# Altium PCB esp32wrom.PcbDoc
Units mm, origin at the board's own origin, x right, y up, seen from the top; angles counter-clockwise.
Board outline 50.04 x 27.94 mm, 2 copper layers (Top Layer, Bottom Layer); 27 components, 25 nets, 182 pads, 32 vias.
Unrouted connection lines stored in the file: 2.
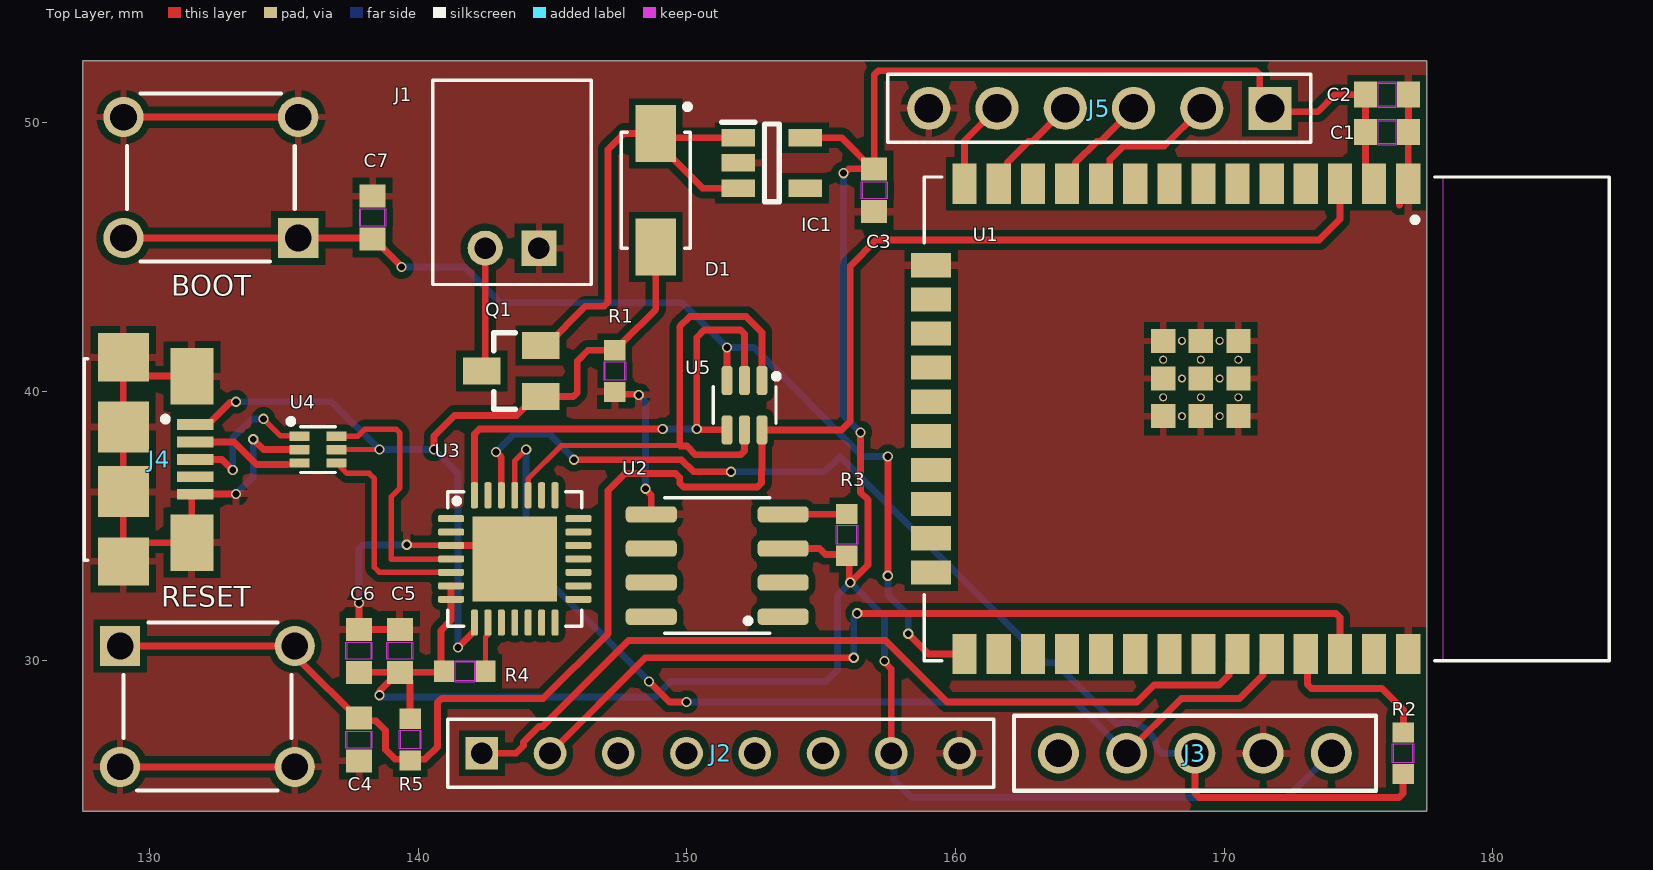
[diagram p0: Top Layer view]
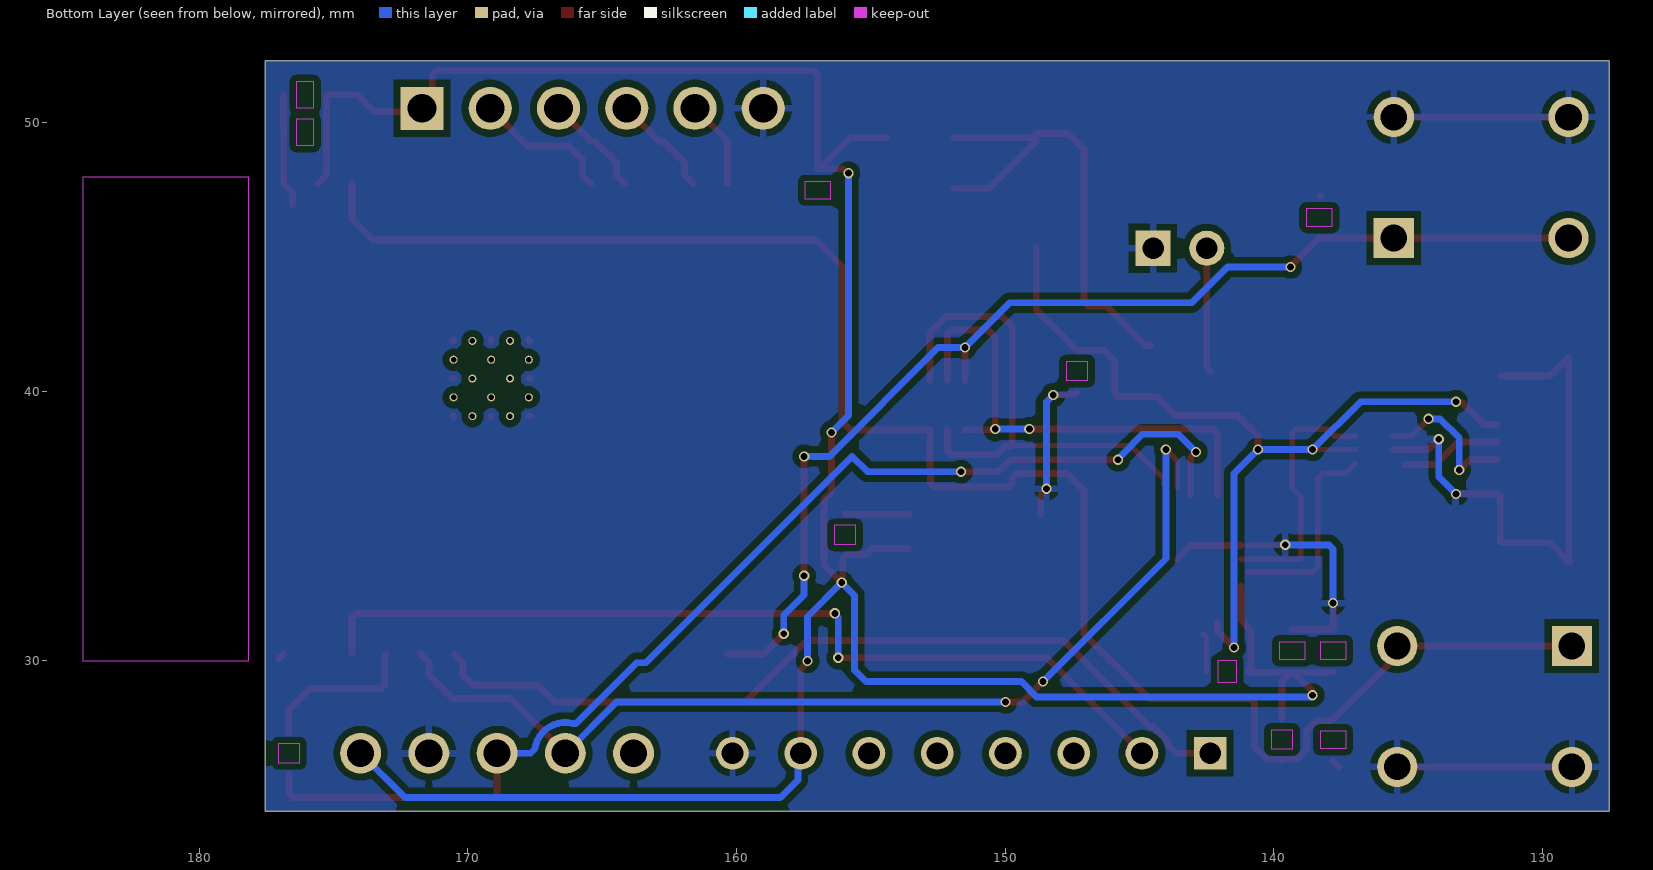
[diagram p1: Bottom Layer view, seen from below]
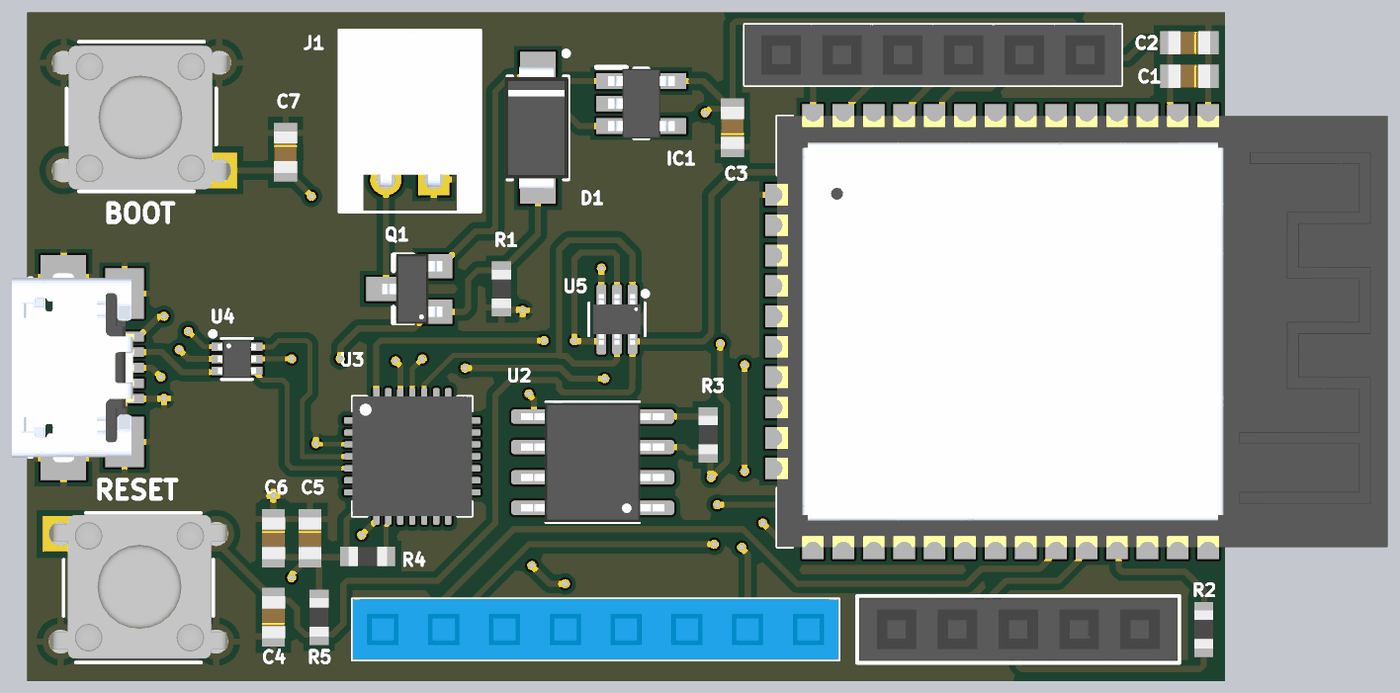
[diagram p2: 3D render of the assembled board from above, using the file's embedded part models]

## Layer stack, top to bottom
Top Solder: solder mask 0.0102, Solder Resist, Dk 3.5
Top Layer: signal copper 0.0356
Dielectric 1: dielectric 0.32, FR-4, Dk 4.8
Bottom Layer: signal copper 0.0356
Bottom Solder: solder mask 0.0102, Solder Resist, Dk 3.5

## Board outline
127.508,24.384 127.508,52.324 177.546,52.324 177.546,24.384

## Design rules (kind name [scope] priority, off if disabled: settings)
Clearance [All] p1: gap=0.254 ignorepadtopadclearanceinfootprint=FALSE
PolygonConnect [All] p1: connectstyle=Relief reliefconductorwidth=0.254 reliefentries=4 polygonreliefangle="90 Angle" airgapwidth=0.254
RoutingVias [All] p1: holewidth=0.711 width=1.27 viastyle="Through Hole" minholewidth=0.711 minwidth=1.27 maxholewidth=0.711 maxwidth=1.27
SolderMaskExpansion [All] p1: expansion=0.102 istentingtop=FALSE
SupplyNets "Schematic Supply Nets_1" [InNet('3V3')] p1: voltage=0.000
SupplyNets "Schematic Supply Nets" [InNet('GND')] p2: voltage=0.000
Width [All] p1: maxlimit=0.254 minlimit=0.254 preferedwidth=0.254
30 further rules are at their usual default settings.

## Components (designator, comment, footprint, x,y, rotation, side; value= is the part's Value field where it differs from the comment)
BOOT "1825910-3" SW4_1825910-A_TEC 129.032,50.22 r180 top (schematic designator SW2)
C1 "0.1uF" 0603_AVX 176.057,49.657 r180 top
C2 "22uF" 0603_AVX 176.057,51.054 r180 top
C3 "22uF" 0603_AVX 156.972,47.498 r90 top
C4 "0.1uF" 0603_AVX 137.795,27.051 r90 top
C5 "0.1uF" 0603_AVX 139.319,30.353 r270 top
C6 "1uF" 0603_AVX 137.795,30.353 r270 top
C7 "0.1uF" 0603_AVX 138.303,46.482 r270 top
D1 "SS14" DIOM4325X250N 148.844,47.498 r270 top
IC1 "RT9080-33GJ5" SOT94P280X100-5N 153.162,48.514 r0 top
J1 "2pin" JST_S2B-PH-K-S(LF)(SN) 143.494,45.339 r180 top
J2 "8pin" AMPHENOL_76308-108LF 151.257,26.543 r180 top
J3 "PPPC051LFBN-RC" CONN_PPPC051LFBN-RC_SUL 173.99,26.543 r180 top
J4 "micro-usb" AMPHENOL_10118192-0002LF 131.699,37.48 r270 top
J5 "6pin" SULLINS_PPTC061LFBN-RC 165.354,50.546 r180 top
Q1 "FDN306P" SSOT-3 143.467,40.767 r90 top
R1 "4.7kR" RC0603N_PAN 147.32,40.767 r270 top
R2 "500R" RC0603N_PAN 176.657,26.543 r90 top
R3 "4.7kR" RC0603N_PAN 155.956,34.671 r270 top
R4 "4.7kR" RC0603N_PAN 141.732,29.591 r180 top
R5 "4.7kR" RC0603N_PAN 139.7,27.051 r270 top
RESET "1825910-3" SW4_1825910-A_TEC 135.405,26.035 r0 top (schematic designator SW1)
U1 "ESP32-WROOM-32E_(16MB)" XCVR_ESP32-WROOM-32E_(16MB) 171.587,38.989 r270 top
U2 "DS18B20Z" SOIC127P600X175-8N 151.13,33.528 r180 top
U3 "CP2102-GM" QFN50P500X500X100-29N 143.594,33.774 r0 top
U4 "USBLC6-2P6" SOT50P160X60-6N 136.271,37.846 r0 top
U5 "UMH3NTN" SOP65P210X100-6N 152.146,39.497 r270 top

## Footprints (in the part's own frame and the unit in brackets; to place one, negate y for a bottom-side part, rotate by r counter-clockwise, add the part's x,y. Pads: shape width x height; smd on the part's side, far side on the other; paste and mask are expansions set on the pad)
0603_AVX [mil]
  rect 33.78x38 smd paste+0 mask+0: 1(-31.39,0) 2(31.39,0)
  Top Layer keep-out region: -12.5,-17 -12.5,17 12.5,17 12.5,-17
  Keep-Out Layer region: -12.5,-19 -12.5,19 12.5,19 12.5,-19
  body extent -34,-19 34,19, height 35
AMPHENOL_76308-108LF [mm]
  rect 1.22x1.22 / inner round 1.22 / far side rect 1.22x1.22 hole 0.81: 01(8.89,0)
  round 1.22 hole 0.81: 02(6.35,0) 03(3.81,0) 04(1.27,0) 05(-1.27,0) 06(-3.81,0) 07(-6.35,0) 08(-8.89,0)
  silkscreen extent -10.16,-1.27 10.16,1.27, body extent -10.16,-1.27 10.16,1.27, height 8.51
AMPHENOL_10118192-0002LF [mm]
  rect 0.4x1.35 smd: 1(-1.3,0) 2(-0.65,0) 3(0,0) 4(0.65,0) 5(1.3,0)
  rect 2.1x1.6 smd: S1(-3.1,-0.125) S2(3.1,-0.125)
  rect 1.8x1.9 smd: S3(-3.8,-2.675) S6(3.8,-2.675)
  rect 1.9x1.9 smd: S4(-1.2,-2.675) S5(1.2,-2.675)
  silkscreen extent -3.75,-4.13 3.75,-1.01, body extent -3.95,-4.82 3.95,0.28, height 2.7
CONN_PPPC051LFBN-RC_SUL [mil]
  round 60 hole 40 paste-99999 mask-30: 1(0,0) 2(100,0) 3(200,0) 4(300,0) 5(400,0)
  silkscreen extent -65,-55 465,55, body extent -60,-50 460,50, height 335
DIOM4325X250N [mm]
  rect 2.12x1.5 smd paste+0 mask+0.102: A(2.115,0) C(-2.115,0)
  silkscreen extent -3.21,-1.28 2.16,1.28, body extent -2.55,-1.4 2.55,1.27, height 2.29
JST_S2B-PH-K-S(LF)(SN) [mm]
  rect 1.308x1.308 / inner round 1.308 / far side rect 1.308x1.308 hole 0.8: 1(-1,0)
  round 1.308 hole 0.8: 2(1,0)
  silkscreen extent -2.95,-6.25 2.95,1.35, body extent -2.95,-6.2 2.95,1.4, height 4.8
QFN50P500X500X100-29N [mm]
  rrect50% 0.97x0.26 smd: 1(-2.37,1.5) 2(-2.37,1) 3(-2.37,0.5) 4(-2.37,0) 5(-2.37,-0.5) 6(-2.37,-1) 7(-2.37,-1.5) 15(2.37,-1.5) 16(2.37,-1) 17(2.37,-0.5) 18(2.37,0) 19(2.37,0.5) 20(2.37,1) 21(2.37,1.5)
  rrect50% 0.26x0.97 smd: 8(-1.5,-2.37) 9(-1,-2.37) 10(-0.5,-2.37) 11(0,-2.37) 12(0.5,-2.37) 13(1,-2.37) 14(1.5,-2.37) 22(1.5,2.37) 23(1,2.37) 24(0.5,2.37) 25(0,2.37) 26(-0.5,2.37) 27(-1,2.37) 28(-1.5,2.37)
  rect 3.15x3.15 smd paste-0.585: 29(0,0)
  silkscreen extent -2.5,-2.5 2.5,2.5, body extent -2.5,-2.5 2.5,2.5, height 1
RC0603N_PAN [mm]
  rect 0.75x0.8 smd paste+0 mask+0: 1(-0.775,0) 2(0.775,0)
  Top Layer keep-out region: -0.349,-0.349 -0.349,0.349 0.349,0.349 0.349,-0.349
  Keep-Out Layer region: -0.349,-0.4 -0.349,0.4 0.349,0.4 0.349,-0.4
  body extent -0.8,-0.4 0.8,0.4, height 0.71
SOIC127P600X175-8N [mm]
  rrect50% 1.9x0.6 smd paste+0 mask+0.102: 1(-2.455,1.905) 2(-2.455,0.635) 3(-2.455,-0.635) 4(-2.455,-1.905) 5(2.455,-1.905) 6(2.455,-0.635) 7(2.455,0.635) 8(2.455,1.905)
  silkscreen extent -1.95,-2.52 1.95,2.52, body extent -3,-2.49 3,2.49, height 1.68
SOP65P210X100-6N [mm]
  rrect50% 1.09x0.4 smd: 1(-0.92,0.65) 2(-0.92,0) 3(-0.92,-0.65) 4(0.92,-0.65) 5(0.92,0) 6(0.92,0.65)
  silkscreen extent -1.18,-1.17 0.68,1.28, body extent -1.05,-1 1.05,1, height 1
SOT50P160X60-6N [mm]
  rrect8% 0.75x0.35 smd: 1(-0.69,0.5) 2(-0.69,0) 3(-0.69,-0.5) 4(0.69,-0.5) 5(0.69,0) 6(0.69,0.5)
  silkscreen extent -1.11,-0.85 0.65,1.15, body extent -0.8,-0.8 0.8,0.8, height 0.6
SOT94P280X100-5N [mm]
  rect 1.25x0.65 smd: 1(-1.25,0.94) 2(-1.25,0) 3(-1.25,-0.94) 4(1.25,-0.94) 5(1.25,0.94)
  silkscreen extent -1.88,-1.45 0.28,1.51, body extent -1.4,-1.45 1.4,1.45, height 1
SSOT-3 [mm]
  rect 1x1.4 smd: 1(-0.95,-1.1) 2(0.95,-1.1) 3(0,1.1)
  silkscreen extent -1.42,-0.15 1.42,0.66, body extent -1.46,-1.38 1.46,1.13, height 1.12
SULLINS_PPTC061LFBN-RC [mm]
  rect 1.605x1.605 / inner round 1.605 / far side rect 1.605x1.605 hole 1.07: 1(-6.35,0)
  round 1.605 hole 1.07: 2(-3.81,0) 3(-1.27,0) 4(1.27,0) 5(3.81,0) 6(6.35,0)
  silkscreen extent -7.87,-1.27 7.87,1.27, body extent -7.87,-1.27 7.87,1.27, height 8.51
SW4_1825910-A_TEC [mil]
  rect 59x59 / inner round 60 / far side rect 59x59 hole 39 paste-99999 mask+0: 1(-255.91,177.17)
  round 59 / inner round 60 / far side round 59 hole 39 paste-99999 mask-29.5: 2(0,177.17) 3(-255.91,0) 4(0,0)
  silkscreen extent -251,-34 -5,212, body extent -280,-28 27,208, height 150
XCVR_ESP32-WROOM-32E_(16MB) [mm]
  rect 1.5x0.9 smd: 1(-8.75,5.26) 2(-8.75,3.99) 3(-8.75,2.72) 4(-8.75,1.45) 5(-8.75,0.18) 6(-8.75,-1.09) 7(-8.75,-2.36) 8(-8.75,-3.63) 9(-8.75,-4.9) 10(-8.75,-6.17) 11(-8.75,-7.44) 12(-8.75,-8.71) 13(-8.75,-9.98) 14(-8.75,-11.25) 25(8.75,-11.25) 26(8.75,-9.98) 27(8.75,-8.71) 28(8.75,-7.44) 29(8.75,-6.17) 30(8.75,-4.9) 31(8.75,-3.63) 32(8.75,-2.36) 33(8.75,-1.09) 34(8.75,0.18) 35(8.75,1.45) 36(8.75,2.72) 37(8.75,3.99) 38(8.75,5.26)
  rect 0.9x1.5 smd: 15(-5.715,-12.5) 16(-4.445,-12.5) 17(-3.175,-12.5) 18(-1.905,-12.5) 19(-0.635,-12.5) 20(0.635,-12.5) 21(1.905,-12.5) 22(3.175,-12.5) 23(4.445,-12.5) 24(5.715,-12.5)
  rect 0.9x0.9 smd: 39_1(-2.9,-1.06) 39_2(-1.5,-1.06) 39_3(-0.1,-1.06) 39_4(-2.9,-2.46) 39_5(-1.5,-2.46) 39_6(-0.1,-2.46) 39_7(-2.9,-3.86) 39_8(-1.5,-3.86) 39_9(-0.1,-3.86)
  round 0.3 hole 0.2 mask+0: 39_10(-2.2,-1.06) 39_11(-0.8,-1.06) 39_12(-2.9,-1.76) 39_13(-1.5,-1.76) 39_14(-0.1,-1.76) 39_15(-2.2,-2.46) 39_16(-0.8,-2.46) 39_17(-2.9,-3.16) 39_18(-1.5,-3.16) 39_19(-0.1,-3.16) 39_20(-2.2,-3.86) 39_21(-0.8,-3.86)
  Keep-Out Layer region: 9,6.56 -9,6.56 -9,12.75 9,12.75
  silkscreen extent -9,-12.75 9,12.75, body extent -9,-12.75 9,12.75, height 3.25

## Part data
BOOT RESET: "FSM2JAH=6MM TACT SWITCH, HIGH TEMP", Manufacturer_Name="TE Connectivity", Copyright="Copyright (C) 2025 Ultra Librarian. All rights reserved.", Manufacturer_Part_Number=1825910-3, RefDes=RefDes, Type=Type
C1 C2 C3 C4 C5 C6 C7: library part 0603, "Description", Manufacturer_Name="KYOCERA AVX", Manufacturer_Part_Number=0603YC683KAT2A, Copyright="Copyright (C) 2025 Ultra Librarian. All rights reserved."
D1: "1A, 40V, Schottky Rectifier", Package="SMA-2 Taiwan Semiconductor", Check_prices=https://www.snapeda.com/parts/SS14/taiwan/view-part/?ref=eda, MF="Taiwan Semiconductor", MP=SS14, SnapEDA_Link=https://www.snapeda.com/parts/SS14/taiwan/view-part/?ref=snap
IC1: "Linear Voltage Regulator IC Positive Fixed 1 Output 600mA TSOT-23-5", Package="TSOT-23 Richtek", Check_prices=https://www.snapeda.com/parts/RT9080-33GJ5/Richtek+USA+Inc./view-part/?ref=eda, MF="Richtek USA", MP=RT9080-33GJ5, SnapEDA_Link=https://www.snapeda.com/parts/RT9080-33GJ5/Richtek+USA+Inc./view-part/?ref=snap
J1: "Connector Header Through Hole, Right Angle 2 position", Package=None, Availability="In Stock", Check_prices=https://www.snapeda.com/parts/S2B-PH-K-S(LF)(SN)/JST+Sales+America+Inc./view-part/?ref=eda, MF="JST Sales America Inc.", MP=S2B-PH-K-S(LF)(SN), Price=None, Purchase-URL=https://pricing.snapeda.com/search/part/S2B-PH-K-S(LF)(SN)/?ref=eda, SnapEDA_Link=https://www.snapeda.com/parts/S2B-PH-K-S(LF)(SN)/JST+Sales+America+Inc./view-part/?ref=snap
J2: "DuboxÂ® 2.54mm, Board to Board Connector, 8 Positions,Single Row,Vertical,2.54mm pitch,Card Connector", Package=None, Availability="In Stock", Check_prices=https://www.snapeda.com/parts/76308-108LF/Amphenol/view-part/?ref=eda, MF=Amphenol, MP=76308-108LF, Price=None, Purchase-URL=https://pricing.snapeda.com/search/part/76308-108LF/?ref=eda, SnapEDA_Link=https://www.snapeda.com/parts/76308-108LF/Amphenol/view-part/?ref=snap
J3: library part 5pin, "Description", Manufacturer_Name=Sullins, Copyright="Copyright (C) 2025 Ultra Librarian. All rights reserved.", Manufacturer_Part_Number=PPPC051LFBN-RC, RefDes=RefDes, Type=Type
J4: "Micro USB 2.0, Input Output Connectors, B TYPE RECEPTACLE without flange", Package=None, Check_prices=https://www.snapeda.com/parts/10118192-0002LF/Amphenol+FCI/view-part/?ref=eda, MF="Amphenol ICC", MP=10118192-0002LF, SnapEDA_Link=https://www.snapeda.com/parts/10118192-0002LF/Amphenol+FCI/view-part/?ref=snap
J5: "6 Position Total Single Row 2.54 mm Pitch Straight Female Header", Package=None, Check_prices=https://www.snapeda.com/parts/PPTC061LFBNRC/Sullins/view-part/?ref=eda, MF="Sullins Connector Solutions", MP=PPTC061LFBNRC, SnapEDA_Link=https://www.snapeda.com/parts/PPTC061LFBNRC/Sullins/view-part/?ref=snap
Q1: "P-Channel 12V 2.6A (Ta) 500mW (Ta) Surface Mount SuperSOT-3", Package="TO-236-3 ON", Check_prices=https://www.snapeda.com/parts/FDN306P/Onsemi/view-part/?ref=eda, MF="ON Semiconductor", MP=FDN306P, SnapEDA_Link=https://www.snapeda.com/parts/FDN306P/Onsemi/view-part/?ref=snap
R1 R2 R3 R4 R5: library part 0603, "No Description Available", Manufacturer_Name=Panasonic, Manufacturer_Part_Number=ERJ-3GEYJ6R8V, Copyright="Copyright (C) 2025 Ultra Librarian. All rights reserved."
U1: "Bluetooth, WiFi 802.11b/g/n, Bluetooth v4.2 +EDR, Class 1, 2 and 3 Transceiver Module 2.4GHz ~ 2.5GHz Integrated, Trace Surface Mount", Package=None, Availability="Not in stock", Check_prices=https://www.snapeda.com/parts/ESP32-WROOM-32E%20(16MB)/Espressif+Systems/view-part/?ref=eda, MF="Espressif Systems", MP="ESP32-WROOM-32E (16MB)", Price=None, SnapEDA_Link=https://www.snapeda.com/parts/ESP32-WROOM-32E%20(16MB)/Espressif+Systems/view-part/?ref=snap
U2: "Programmable Resolution 1-Wire Digital Thermometer", Package="SOIC-8 Maxim", Check_prices=https://www.snapeda.com/parts/DS18B20Z+T&R/Analog+Devices/view-part/?ref=eda, MF="Analog Devices", MP=DS18B20Z+T&amp;R, SnapEDA_Link=https://www.snapeda.com/parts/DS18B20Z+T&R/Analog+Devices/view-part/?ref=snap
U3: "USB Bridge, USB to UART USB 2.0 UART Interface 28-QFN (5x5)", Package="QFN-28 Silicon Labs", Check_prices=https://www.snapeda.com/parts/CP2102-GM/Silicon+Labs/view-part/?ref=eda, MF="Silicon Labs", MP=CP2102-GM, SnapEDA_Link=https://www.snapeda.com/parts/CP2102-GM/Silicon+Labs/view-part/?ref=snap
U4: "17V Clamp 5A (8/20Âµs) Ipp Tvs Diode Surface Mount SOT-666", Package="SOT-666 STMicroelectronics", Check_prices=https://www.snapeda.com/parts/USBLC6-2P6/STMicroelectronics/view-part/?ref=eda, MF=STMicroelectronics, MP=USBLC6-2P6, SnapEDA_Link=https://www.snapeda.com/parts/USBLC6-2P6/STMicroelectronics/view-part/?ref=snap
U5: "Pre-Biased Bipolar Transistor (BJT) 2 NPN - Pre-Biased (Dual) 50V 100mA 250MHz 150mW Surface Mount UMT6", Package="SOT-363 Rohm", Check_prices=https://www.snapeda.com/parts/UMH3NTN/Rohm/view-part/?ref=eda, MF=Rohm, MP=UMH3NTN, SnapEDA_Link=https://www.snapeda.com/parts/UMH3NTN/Rohm/view-part/?ref=snap

## Via types
v1: diameter 0.381, hole 0.254, Top Layer to Bottom Layer, 32 vias

## Nets (pads, with @x,y where several pads share a name; then routed paths per layer and width w, separated by ;. In a path a pad name is that pad's centre, name@x,y a point inside that pad or via, vN(x,y) a via of type N, cw(c..) or ccw(c..) an arc to the next point about the centre after c; other vN are vias at no path point)
3V3: C1.2 C2.2 C3.2 C5.2 C6.2 IC1.5 J2.07 J3.1 J5.1 R3.2 R4.2 R5.1 U1.2 U2.3 U3.6 U3.7 | length 106.1
  Top Layer w0.254: C6.2 C5.2 ; v1(138.557,28.702) 138.581,28.726 138.581,28.872 139.265,29.556 C5.2 ; C5.2@139.373,29.556 139.7,29.228 R5.1 ; U3.6 U3.7 141.224,31.496 140.843,31.115 140.843,29.705 R4.2 140.922,29.556 C5.2 ; U2.3 154.934,34.163 155.156,33.941 155.911,33.941 156.046,33.806 156.046,32.965 156.083,32.927 v1(156.083,32.893) 156.737,33.547 156.737,35.979 156.464,36.252 v1(156.464,38.481) ; IC1.5 155.76,49.454 156.918,48.295 156.026,48.295 155.863,48.133 v1(155.829,48.133) ; C3.2 156.972,51.794 157.121,51.943 171.174,51.943 171.323,51.794 171.323,50.927 J5.1 171.831,50.419 173.482,50.419 174.117,51.054 C2.2 C1.2 175.26,48.056 U1.2 ; v1(157.353,29.972) 157.353,29.938 157.607,29.684 J2.07
  Bottom Layer w0.254: v1(138.557,28.702) 138.62,28.639 148.827,28.639 149.398,29.21 155.172,29.21 155.607,29.645 155.607,32.417 v1(156.083,32.893) 157.353,31.623 v1(157.353,29.972) ; v1(155.829,48.133) 155.829,39.116 v1(156.464,38.481) ; J2.07 157.709,26.441 157.709,25.552 158.369,24.892 172.339,24.892 J3.1
DTR: U3.28 U5.2 U5.4 | length 18.9
  Top Layer w0.254: U3.28 142.094,38.428 142.274,38.608 v1(149.098,38.608) ; U5.4@151.49,38.583 150.427,38.583 150.402,38.608 v1(150.368,38.608) 150.368,42.015 150.644,42.291 151.997,42.291 152.146,42.142 U5.2
  Bottom Layer w0.254: v1(149.098,38.608) v1(150.368,38.608)
EN: C4.2 R5.2 RESET.1 RESET.2 U1.3 U5.6 | length 66.6
  Top Layer w0.254: RESET.1 RESET.2 135.643,30.297 135.643,29.947 137.741,27.848 C4.2 137.894,27.749 138.435,27.749 138.789,27.396 138.789,26.674 139.142,26.321 139.655,26.321 R5.2 139.745,26.321 140.258,26.321 140.716,26.779 140.716,28.426 140.865,28.575 144.653,28.575 147.066,30.988 147.066,36.322 147.701,36.957 149.584,36.957 149.733,36.808 149.733,36.598 149.882,36.449 152.632,36.449 152.781,36.598 152.781,37.091 152.796,37.106 U5.6 155.752,38.577 156.083,38.908 156.083,44.682 157.046,45.646 173.535,45.646 174.307,46.418 U1.3
GND: BOOT.3 BOOT.4 C1.1 C2.1 C3.1 C4.1 C5.1 C6.1 C7.1 IC1.2 J1.1 J2.08 J3.2 J4.5 J4.S1 J4.S2 J4.S3 J4.S4 J4.S5 J4.S6 J5.6 R1.2 RESET.3 RESET.4 U1.1 U1.15 U1.38 U1.39_1 U1.39_2 U1.39_3 U1.39_4 U1.39_5 U1.39_6 U1.39_7 U1.39_8 U1.39_9 U2.5 U3.3 U3.29 U4.2 | length 56
  Top Layer w0.2: v1(139.574,34.304) 139.589,34.289 140.969,34.289 U3.3@140.97,34.29
  Top Layer w0.254: RESET.3 RESET.4 ; J4.S6@128.974,33.68 J4.S6 ; BOOT.4 BOOT.3 BOOT.3@135.532,49.997 ; J4.S6@129.074,33.68 J4.S6 ; J4.S1 129.724,40.58 J4.S3 J4.S4 J4.S5 J4.S6 ; v1(133.223,36.195) 133.216,36.188 131.707,36.188 J4.5 131.647,36.18 131.574,36.107 J4.S2 129.724,34.38 J4.S6 ; v1(133.858,38.227) 134.239,37.846 U4.2 ; C4.1@137.576,26.035 C4.1 ; v1@137.795,32.004 C6.1 C5.1 ; C7.1@138.249,47.279 C7.1 ; U3.3 143.094,34.274 U3.29 ; J1.1 J1.1@144.526,45.307 ; R1.2 147.41,39.902 148.185,39.902 v1(148.209,39.878) ; v1(148.463,36.386) 148.463,36.351 148.675,36.139 U2.5 ; J5.6@159.004,50.18 J5.6 ; J2.08@160.147,26.416 J2.08 ; U1.39_9@167.676,39.089 U1.39_9 ; U1.39_8@167.676,40.489 U1.39_8 ; U1.39_7@167.676,41.889 U1.39_7 U1.39_7@167.727,41.94 ; U1.39_6@169.127,39.038 U1.39_6 ; U1.39_4 U1.39_4@169.127,41.94 ; U1.39_3@170.527,39.038 U1.39_3 U1.39_3@170.578,39.089 ; U1.39_2 U1.39_2@170.578,40.489 ; U1.39_1@170.527,41.94 U1.39_1 U1.39_1@170.578,41.889 ; 176.524,46.947 176.524,47.416 U1.1 176.847,49.65 C1.1 C2.1 ; U1.38 U1.38@177.038,30.048
  Bottom Layer w0.254: v1(133.223,36.195) 133.858,36.83 v1(133.858,38.227) ; v1(137.795,32.131) 137.795,34.141 137.944,34.29 139.561,34.29 v1(139.574,34.304) ; v1(148.209,39.878) 148.463,39.624 v1(148.463,36.386)
IO0: BOOT.1 BOOT.2 C7.2 U1.25 U5.3 | length 42.4
  Top Layer w0.254: BOOT.2 BOOT.1 138.321,45.72 139.382,44.659 v1(139.382,44.64) ; U5.3 v1(151.496,41.641) ; v1(157.48,33.147) v1(157.48,37.592) ; v1(158.242,30.988) 158.991,30.239 U1.25
  Bottom Layer w0.254: v1(139.382,44.64) 141.729,44.64 143.062,43.307 149.83,43.307 v1(151.496,41.641) 152.496,41.641 156.545,37.592 v1(157.48,37.592) ; v1(157.48,33.147) 157.48,32.431 158.242,31.669 v1(158.242,30.988)
IO4: U1.26
IO12: J5.5 U1.14 | length 3.3
  Top Layer w0.254: U1.14 160.337,49.339 J5.5
IO14: J5.4 U1.13 | length 3.9
  Top Layer w0.254: U1.13 161.93,48.062 161.93,48.531 162.717,49.318 162.856,49.318 J5.4
IO21: J2.01 U1.33 | length 31.9
  Top Layer w0.254: J2.01 143.637,26.543 143.916,26.822 143.916,26.953 144.497,27.534 144.628,27.534 147.828,30.734 157.399,30.734 159.685,28.448 166.751,28.448 167.386,29.083 169.81,29.083 170.174,29.447 170.174,29.916 U1.33
IO22: J2.02 U1.36 | length 33.9
  Top Layer w0.254: J2.02 148.463,30.099 v1(156.21,30.099) ; v1(156.337,31.75) 174.158,31.75 174.307,31.601 U1.36
  Bottom Layer w0.254: v1(156.21,30.099) 156.21,31.589 156.337,31.716 v1(156.337,31.75)
IO25: J5.2 U1.10 | length 5.3
  Top Layer w0.254: U1.10 165.74,48.062 165.74,48.646 166.243,49.149 167.767,49.149 J5.2
IO26: J5.3 U1.11 | length 3.9
  Top Layer w0.254: U1.11 164.47,48.062 164.47,48.531 165.257,49.318 165.396,49.318 J5.3
NetD1_C: D1.C IC1.1 IC1.3 Q1.2 | length 18.1
  Top Layer w0.254: Q1.2 144.767,41.717 146.23,43.18 146.917,43.18 147.066,43.329 147.066,49.022 147.657,49.613 D1.C ; IC1.3 150.573,47.574 148.844,49.303 D1.C ; IC1.1 149.003,49.454 D1.C
NetJ1_2: J1.2 Q1.3 | length 4.6
  Top Layer w0.254: Q1.3 142.494,40.894 J1.2
NetJ4_2: J4.2 U4.3 | length 3.8
  Top Layer w0.254: J4.2 133.143,38.13 133.982,37.291 134.96,37.291 134.962,37.29 135.128,37.29
NetJ4_3: J4.3 U4.1 | length 5.8
  Top Layer w0.2: v1(134.239,38.989) 134.874,38.354 U4.1@135.581,38.354
  Top Layer w0.254: J4.3 132.7,37.48 v1(133.096,37.084)
  Bottom Layer w0.254: v1(133.096,37.084) 133.096,38.273 133.812,38.989 v1(134.239,38.989)
NetR2_2: R2.2 U1.35 | length 6
  Top Layer w0.254: U1.35 173.101,30.175 173.101,29.105 173.25,28.956 175.873,28.956 176.677,28.153 R2.2@176.677,27.304
NetR3_1: R3.1 U2.4 | length 2.4
  Top Layer w0.254: U2.4 153.591,35.439 155.95,35.439 R3.1
NetR4_1: R4.1 U3.9 | length 1.4
  Top Layer w0.2: R4.1 142.507,30.874 U3.9@142.621,30.988
NetU3_4: U3.4 U4.6 | length 9.6
  Top Layer w0.2: U4.6 137.752,38.346 138.014,38.608 139.17,38.608 139.319,38.459 139.319,36.415 139.003,36.099 139.003,33.759 141.209,33.759 U3.4
NetU3_5: U3.5 U4.4 | length 7.6
  Top Layer w0.2: U4.4 137.35,36.957 138.176,36.957 138.367,36.766 138.367,33.464 138.557,33.274 U3.5@140.97,33.274
RTS: U3.24 U5.1 U5.5 | length 19.5
  Top Layer w0.2: U3.24@144.094,36.525 144.094,36.76 145.329,37.995 149.733,37.995
  Top Layer w0.254: U5.5 152.146,37.8 151.997,37.651 150.327,37.651 150.005,37.973 149.755,37.973 149.733,37.995 149.733,42.418 150.114,42.799 152.208,42.799 152.796,42.211 U5.1
RXD: J3.4 U1.34 U3.25 | length 38.2
  Top Layer w0.2: U3.25@143.59,36.443 143.59,37.418 v1(144.018,37.846)
  Top Layer w0.254: v1(148.59,29.21) 149.352,28.448 v1(149.987,28.448) ; J3.4 168.402,28.575 170.572,28.575 171.444,29.447 171.444,29.916 U1.34
  Bottom Layer w0.254: v1(144.018,37.846) 144.018,33.782 v1(148.59,29.21) ; v1(149.987,28.448) 164.465,28.448 J3.4
TXD: J3.3 R2.1 U3.26 | length 43.4
  Top Layer w0.254: v1(142.898,37.757) 143.094,37.561 U3.26 ; v1(145.796,37.465) 149.795,37.465 150.239,37.02 v1(151.638,37.02) ; J3.3 168.91,25.041 169.059,24.892 176.508,24.892 176.657,25.041 R2.1
  Bottom Layer w0.254: v1(142.898,37.757) 143.558,38.417 144.887,38.417 v1@145.713,37.592 ; v1(151.638,37.02) 155.131,37.02 155.702,37.592 163.386,29.909 163.723,29.909 165.976,27.656 166.081,27.656 166.109,27.656 cw(c166.37,26.543) 167.475,26.836 167.513,26.692 167.662,26.543 167.744,26.543 J3.3
VBUS: D1.A J4.1 Q1.1 R1.1 U3.8 U4.5 | length 34.2
  Top Layer w0.2: U4.5 v1(138.557,37.846)
  Top Layer w0.254: J4.1 132.174,38.78 132.994,39.6 133.199,39.6 v1(133.223,39.624) ; v1(140.589,37.846) 140.589,38.354 141.351,39.116 143.666,39.116 144.367,39.817 145.774,39.817 145.923,39.966 145.923,41.148 146.317,41.542 R1.1 147.345,41.542 147.593,41.79 147.593,41.815 148.844,43.066 D1.A ; v1(141.478,30.48) 142.094,31.096 U3.8
  Bottom Layer w0.254: v1(133.223,39.624) 136.779,39.624 v1(138.557,37.846) v1(140.589,37.846) 141.478,36.957 v1(141.478,30.48)
pads on no net: IC1.4 J2.03 J2.04 J2.05 J2.06 J3.5 J4.4 U1.4 U1.5 U1.6 U1.7 U1.8 U1.9 U1.12 U1.16 U1.17 U1.18 U1.19 U1.20 U1.21 U1.22 U1.23 U1.24 U1.27 U1.28 U1.29 U1.30 U1.31 U1.32 U1.37 U1.39_10 U1.39_11 U1.39_12 U1.39_13 U1.39_14 U1.39_15 U1.39_16 U1.39_17 U1.39_18 U1.39_19 U1.39_20 U1.39_21 U2.1 U2.2 U2.6 U2.7 U2.8 U3.1 U3.2 U3.10 U3.11 U3.12 U3.13 U3.14 U3.15 U3.16 U3.17 U3.18 U3.19 U3.20 U3.21 U3.22 U3.23 U3.27

## Polygon pours and split planes (outlines as drawn)
GND on Top Layer "GND_L01_P000" (solid, pour order 0): 127.508,52.324 127.508,24.384 177.419,24.384 177.546,24.511 177.546,52.324
GND on Bottom Layer "GND_L02_P001" (solid, pour order 1): 127.508,52.324 127.508,24.384 177.546,24.384 177.546,52.324

## Text inside footprints (layer, text, board x,y; h text height)
BOOT: Mechanical 13 "*" at 134.683,46.283 h1.27 r180
RESET: Mechanical 13 "*" at 129.754,29.972 h1.27
U1: Mechanical 13 "ANTENNA" at 180.587,44.989 h1.78 r270